# Altium PCB PCB1.PcbDoc (part 4 of 4)
Units mm, origin at the board's own origin, x right, y up, seen from the top; angles counter-clockwise.
Board outline 100 x 100 mm, 4 copper layers (Component Side 1, Ground Plane, Power Plane, Component Side 2), stack 0.844 mm thick; 174 components, 192 nets, 1098 pads, 545 vias.
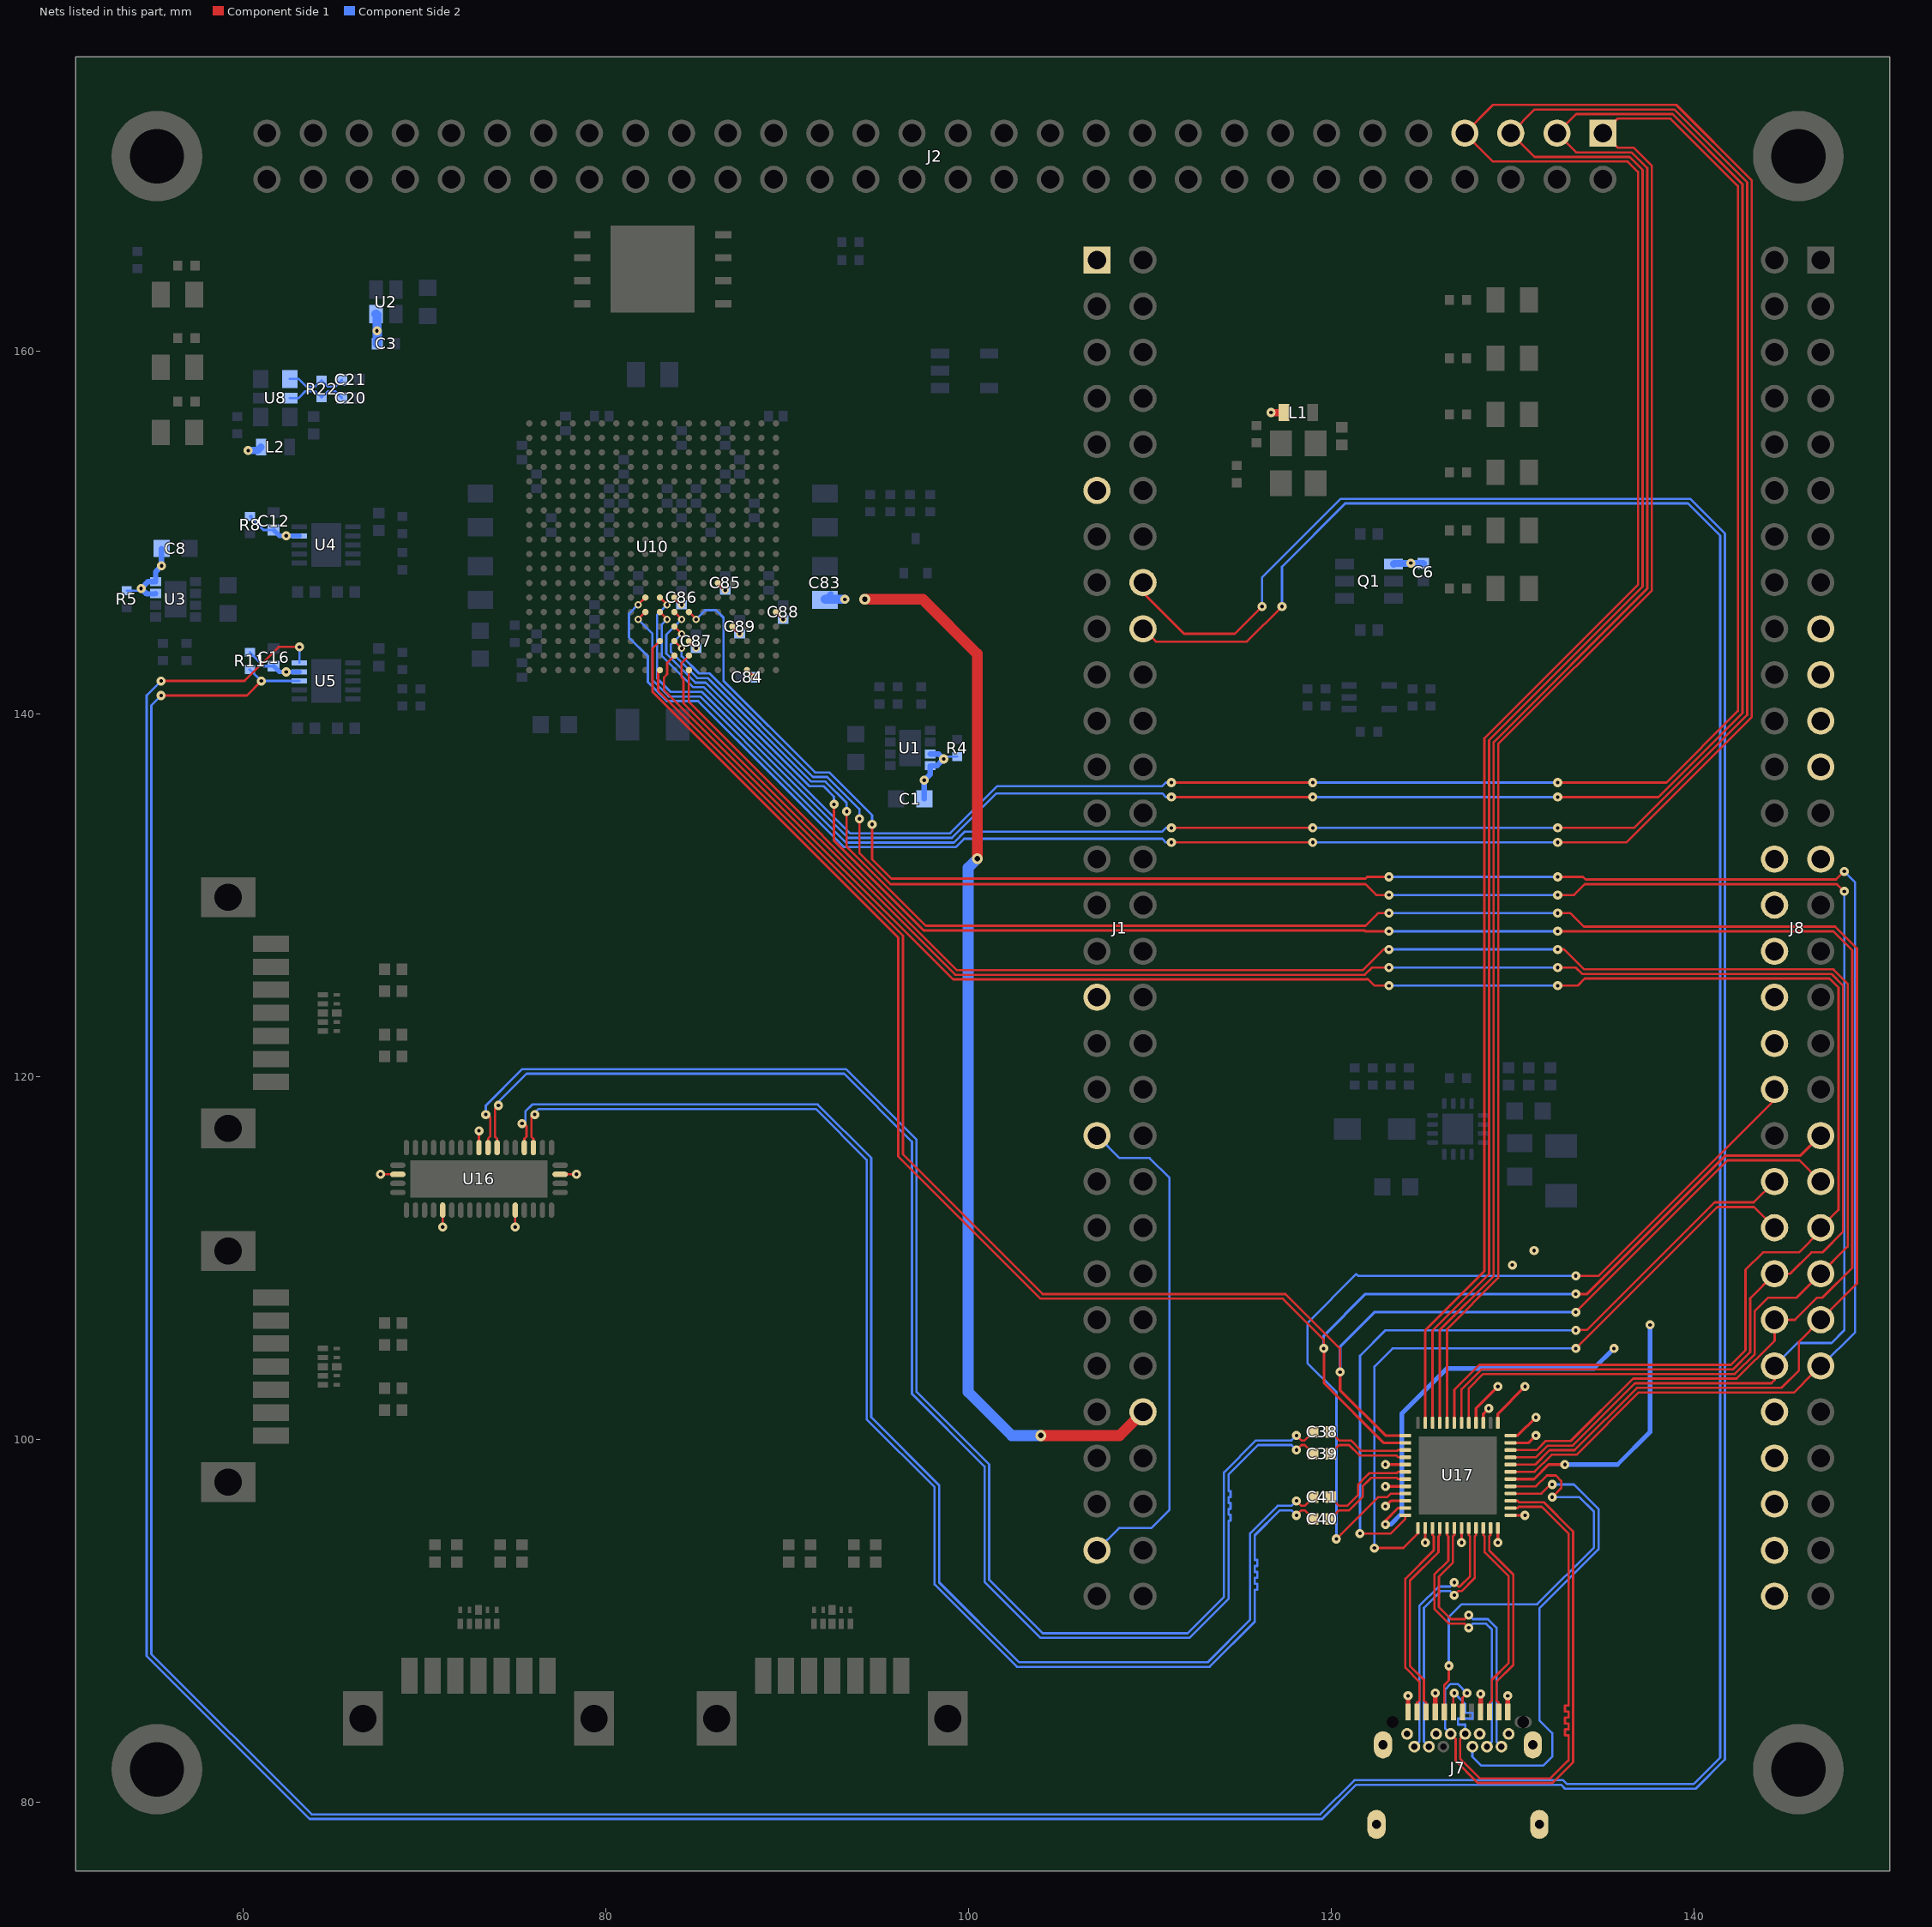
[diagram p5: the nets of this part, all layers, seen from the top]

## Via types
v1: diameter 0.5, hole 0.2, Component Side 1 to Component Side 2, 344 vias
v2: diameter 0.4, hole 0.2, Component Side 1 to Component Side 2, tented top, 149 vias
v3: diameter 0.6, hole 0.3, Component Side 1 to Component Side 2, 33 vias
v4: diameter 0.5, hole 0.2, Component Side 1 to Component Side 2, tented top, 14 vias
v5: diameter 0.5, hole 0.2, Component Side 1 to Component Side 2, tented bottom, 5 vias

## Nets (pads, with @x,y where several pads share a name; then routed paths per layer and width w, separated by ;. In a path a pad name is that pad's centre, name@x,y a point inside that pad or via, vN(x,y) a via of type N, cw(c..) or ccw(c..) an arc to the next point about the centre after c; other vN are vias at no path point) (continued)
U5_EN: J1.16 U5.5 | length 261.6
  Component Side 1 w0.127: v1(55.5,141.8) 60.1,141.8 61.975,143.675 v1(63.125,143.675) ; J1.16@109.64,147.22 109.64,146.66 111.9,144.4 114.7,144.4 v1(116.2,145.9)
  Component Side 2 w0.127: v1(55.5,141.8) 54.704,141.004 54.704,88.044 63.69,79.058 119.51,79.058 121.398,80.946 132.695,80.946 132.912,80.729 140.105,80.729 141.717,82.341 141.717,149.935 139.81,151.842 120.542,151.842 116.2,147.5 v1(116.2,145.9) ; U5.5@63.125,142.8 v1(63.125,143.675)
U5_PG: J1.18 R11.1 U5.3 | length 258.2
  Component Side 1 w0.127: v1(55.5,141) 60.225,141 v1(61.025,141.8) ; J1.18@109.64,144.68 110.349,143.971 115.371,143.971 v1(117.3,145.9)
  Component Side 2 w0.127: v1(55.5,141) 54.958,140.458 54.958,88.149 63.795,79.312 119.405,79.312 121.293,81.2 132.8,81.2 133.017,80.983 140,80.983 141.463,82.446 141.463,149.815 139.69,151.588 120.788,151.588 117.3,148.1 v1(117.3,145.9) ; R11.1@60.375,142.425 R11.1@60.4,142.425 v1(61.025,141.8) U5.3@63.125,141.8
U8_OUT_N: C20.2 R22.1 U8.5 | length 3.5
  Component Side 2 w0.127: U8.5@62.6,157.4 63.088,157.4 63.461,157.773 64.002,157.773 R22.1@64.35,157.425 64.698,157.773 65.097,157.773 C20.2@65.47,157.4
U8_OUT_P: C21.2 R22.2 U8.4 | length 3.5
  Component Side 2 w0.127: U8.4@62.6,158.45 63.088,158.45 63.511,158.027 64.002,158.027 R22.2@64.35,158.375 64.698,158.027 65.097,158.027 C21.2@65.47,158.4
U17A_RX_N: C39.1 U17.4 | length 4.6
  Component Side 1 w0.127: C39.1@119.98,99.2 120.453,99.673 121,99.673 121.573,99.1 123.611,99.1 123.712,99 U17.4@124.1,99
U17A_RX_P: C38.1 U17.3 | length 4.6
  Component Side 1 w0.127: C38.1@119.98,100.4 120.453,99.927 121.105,99.927 121.678,99.354 123.665,99.354 123.712,99.4 U17.3@124.1,99.4
U17A_TX_N: C41.1 U17.6 | length 5.4
  Component Side 1 w0.127: C41.1@119.98,96.8 120.453,96.327 120.9,96.327 121.5,96.927 121.5,97.505 121.897,97.903 122.122,98.127 123.639,98.127 123.712,98.2 U17.6@124.1,98.2
U17A_TX_P: C40.1 U17.7 | length 5.4
  Component Side 1 w0.127: C40.1@119.98,95.6 120.453,96.073 121.005,96.073 121.754,96.822 121.754,97.4 122.127,97.773 122.227,97.873 123.639,97.873 123.712,97.8 U17.7@124.1,97.8
UCONN0_CC1: J7.A5 U17.29 | length 23.9
  Component Side 1 w0.127: J7.A5@126.25,84.96 126.25,86.45 126.5,86.7 v1(126.5,87.5) ; U17.29@129.9,97.4 131.3,97.4 131.9,98 132.4,98 132.7,97.7 132.7,97.3 v1(132.2,96.8) ; v1@132.2,96.84 v1@132.2,96.9
  Component Side 2 w0.127: v1(126.5,87.5) 126.5,90.2 127.2,90.9 131.365,90.9 134.5,94.035 134.5,96 133.7,96.8 ; v1(132.2,96.8) 133.7,96.8
UCONN0_CC2: J7.B5 U17.28 | length 26.3
  Component Side 1 w0.127: U17.28@129.9,97 131.6,97 132.1,97.5 v1(132.2,97.5)
  Component Side 2 w0.127: J7.B5@127.8,83.05 127.8,82.5 128.3,82 131.7,82 132.2,82.5 132.2,83.8 131.495,84.505 131.495,90.671 134.754,93.93 134.754,96.146 133.4,97.5 v1(132.2,97.5)
UCONN0_D_N: J7.A7 J7.B7 U17.27 | length 31.2
  Component Side 1 w0.127: J7.B7@126.6,83.75 126.873,83.477 126.873,82.268 128.02,81.12 128.095,81.046 132.205,81.046 132.28,81.12 133.28,82.12 133.354,82.195 133.354,94.905 133.28,94.98 131.732,96.527 130.361,96.527 130.288,96.6 U17.27@129.9,96.6 ; J7.A7@127.25,84.96 127.25,85.75 v1(127.5,86)
  Component Side 2 w0.127: J7.B7@126.6,83.75 126.3,84.05 126.3,86.2 126.6,86.5 127,86.5 v1(127.5,86)
UCONN0_D_P: J7.A6 J7.B6 U17.26 | length 31.1
  Component Side 1 w0.127: J7.A6@126.75,84.96 126.75,86 v1@126.75,86.1 ; J7.B6@127.405,83.75 J7.B6@127.4,83.75 127.127,83.477 127.127,82.373 128.2,81.3 132.1,81.3 133.05,82.25 133.1,82.3 133.1,83.675 132.9,83.675 132.9,84.002 133.1,84.002 133.1,84.329 132.9,84.329 132.9,84.656 133.1,84.656 133.1,84.983 132.9,84.983 132.9,85.31 133.1,85.31 133.1,85.637 133.1,85.8 133.1,94.8 131.627,96.273 130.361,96.273 130.288,96.2 U17.26@129.9,96.2
  Component Side 2 w0.127: v1(126.8,86) 127.4,85.4 127.4,85.2 127.4,84.917 127.801,84.917 127.801,84.59 127.4,84.59 126.999,84.59 126.999,84.263 127.4,84.263 127.4,84.1 J7.B6@127.4,83.75
UCONN0_GND: J7.A1 J7.A12 J7.B1 J7.B12 J7.S1 J7.S2 J7.S3 J7.S4 J8.21 J8.23 | length 1.8
  Component Side 1 w0.254: J7.A1@124.25,84.96 v1(124.25,85.85) ; J7.A12@129.75,84.96 v1(129.75,85.85)
UCONN0_PWR: J7.A4 J7.A9 J7.B4 J7.B9 J8.17 J8.19 J8.27 | length 2
  Component Side 1 w0.254: J7.A4@125.75,84.96 v1(125.75,86) ; J7.A9@128.25,84.96 v1(128.25,85.95)
UCONN0_RX1_N: J7.B10 U17.21 | length 14.2
  Component Side 1 w0.127: v1(126.8,91.4) 127.023,91.623 127.205,91.623 127.927,92.345 127.927,94.639 128,94.712 U17.21@128,95.1
  Component Side 2 w0.127: J7.B10@125.4,83.05 125.127,83.323 125.127,90.7 126.05,91.623 126.577,91.623 v1(126.8,91.4)
UCONN0_RX1_P: J7.B11 U17.20 | length 14.2
  Component Side 1 w0.127: v1(126.8,92.1) 127.023,91.877 127.1,91.877 127.673,92.45 127.673,94.639 127.6,94.712 U17.20@127.6,95.1
  Component Side 2 w0.127: J7.B11@124.6,83.05 124.873,83.323 124.873,90.805 125.945,91.877 126.577,91.877 v1(126.8,92.1)
UCONN0_RX2_N: J7.A10 U17.22 | length 11.2
  Component Side 1 w0.127: U17.22@128.4,95.1 128.4,94.712 128.473,94.639 128.473,93.768 129.8,92.441 129.8,87.659 128.873,86.732 128.873,85.596 128.75,85.473 J7.A10@128.75,84.96
UCONN0_RX2_P: J7.A11 U17.23 | length 11.2
  Component Side 1 w0.127: U17.23@128.8,95.1 128.8,94.712 128.727,94.639 128.727,93.873 130.054,92.546 130.054,87.554 129.127,86.627 129.127,85.596 129.25,85.473 J7.A11@129.25,84.96
UCONN0_TX1_N: J7.A3 U17.16 | length 11.2
  Component Side 1 w0.127: J7.A3@125.25,84.96 125.25,85.473 125.127,85.596 125.127,86.732 124.354,87.505 124.354,92.195 125.927,93.768 125.927,94.639 126,94.712 U17.16@126,95.1
UCONN0_TX1_P: J7.A2 U17.15 | length 11.2
  Component Side 1 w0.127: J7.A2@124.75,84.96 124.75,85.473 124.873,85.596 124.873,86.627 124.1,87.4 124.1,92.3 125.673,93.873 125.673,94.639 125.6,94.712 U17.15@125.6,95.1
UCONN0_TX2_N: J7.B3 U17.17 | length 15.2
  Component Side 1 w0.127: U17.17@126.4,95.1 126.4,94.712 126.473,94.639 126.473,93.3 125.7,92.527 125.7,90.641 126.518,89.823 127.377,89.823 v1(127.6,89.6)
  Component Side 2 w0.127: v1(127.6,89.6) 127.823,89.823 128.55,89.823 128.873,89.5 128.873,83.323 J7.B3@128.6,83.05
UCONN0_TX2_P: J7.B2 U17.18 | length 15.2
  Component Side 1 w0.127: U17.18@126.8,95.1 126.8,94.712 126.727,94.639 126.727,93.195 125.954,92.422 125.954,90.746 126.623,90.077 127.377,90.077 v1(127.6,90.3)
  Component Side 2 w0.127: v1(127.6,90.3) 127.823,90.077 128.655,90.077 129.127,89.605 129.127,83.323 J7.B2@129.4,83.05
VCC_IN_3V3: C1.2 C3.2 C6.2 C8.2 C12.2 C16.2 J1.1 J1.11 J1.33 J1.39 J1.57 L1.2 L2.2 Q1.1 R4.2 R5.2 R8.2 R11.2 U1.3 U1.4 U2.1 U3.3 U3.4 U4.4 U5.4 U16.9 U16.19 U16.26 U16.34 U16.41 | length 53.6
  Component Side 1 w0.127: v1(67.6,114.6) U16.19@68.55,114.6 ; v1(71.025,111.7) U16.26@71.025,112.625 ; U16.9@73.025,116.075 v1(73.025,117) ; U16.34@75,112.6 U16.34@75.025,112.625 v1(75.025,111.7) ; U16.41@77.5,114.6 78.5,114.6 v1(78.4,114.6)
  Component Side 1 w0.4: v1(116.7,156.6) L1.2@117.41,156.6
  Component Side 2 w0.127: R5.2@53.6,146.775 54.275,146.775 v1(54.4,146.9) ; U1.3@97.9,137.775 U1.3@97.925,137.8 ; v1(98.65,137.5) 98.775,137.625 R4.2@99.4,137.625 ; J1.57@107.1,93.88 108.32,95.1 110.1,95.1 111.1,96.1 111.1,114.4 110,115.5 108.34,115.5 J1.39@107.1,116.74
  Component Side 2 w0.153: R11.2@60.4,143.375 61.155,142.62 C16.2@61.7,142.62 ; R8.2@60.5,150.875 R8.2@60.4,150.875 61.155,150.12 C12.2@61.7,150.12
  Component Side 2 w0.254: C16.2@61.7,142.62 62.02,142.3 U5.4@63.125,142.3 ; C12.2@61.7,150.12 62.02,149.8 U4.4@63.125,149.8
  Component Side 2 w0.3: U3.3@55.2,146.625 55.175,146.6 54.7,146.6 v1(54.4,146.9) 54.775,147.275 U3.4@55.2,147.275 55.2,147.825 v1(55.525,148.15) C8.2@55.525,149.1 ; C1.2@97.575,135.3 v1(97.575,136.325) 97.9,136.65 U1.4@97.9,137.125 98.275,137.125 v1(98.65,137.5) 98.375,137.775 U1.3@97.9,137.775
  Component Side 2 w0.4: v1(60.3,154.5) 60.81,154.5 L2.2@61.01,154.7 ; Q1.1@123.45,148.25 123.48,148.28 C6.2@125.1,148.28
  Component Side 2 w0.5: U2.1@67.35,162.025 67.4,161.975 v1(67.4,161.1) 67.42,161.08 C3.2@67.42,160.4
  other v1: 62.4,142.3 124.4,148.3 62.4,149.8
VCCIO_34: C83.2 C84.2 C85.2 C86.2 C87.2 C88.2 C89.2 J1.52 U10.L6 U10.M3 U10.P7 U10.R4 U10.T1 U10.V5 | length 64.5
  Component Side 1 w0.2: U10.L6@83.8,146.4 v2(84.2,146) ; U10.M3@84.6,144 v2(85,143.6) ; U10.P7@86.2,147.2 v2(86.6,146.8) ; U10.R4@87,144.8 v2(87.4,144.4) ; U10.T1@87.8,142.4 v2(88.2,142) ; U10.V5@89.4,145.6 v2(89.8,145.2)
  Component Side 1 w0.6: v3(94.3,146.3) 97.5,146.3 100.5,143.3 v3(100.5,132) ; v3(104,100.2) 108.34,100.2 J1.52@109.64,101.5
  Component Side 2 w0.3: C83.2@92.1,146.275 C83.2@92.125,146.3 ; C83.2@92.1,146.3 C83.2@92.125,146.3 ; C83.2@92.425,146.6 C83.2@92.125,146.3
  Component Side 2 w0.5: C83.2@92.125,146.3 v1(93.2,146.3)
  Component Side 2 w0.6: v3(100.5,132) 100,131.5 100,102.6 102.4,100.2 v3(104,100.2)
VL716_BUSYIND: J8.46 U10.M2 U17.42 | length 115.3
  Component Side 1 w0.127: U10.M2@84.6,143.2 84.2,142.8 84.2,142 84.3,141.9 84.3,140.578 99.278,125.6 121.859,125.6 122.259,126 v1(123.2,126) ; U17.42@127.2,100.9 127.2,102.759 128.287,103.846 142.158,103.846 143.112,104.799 143.112,107.772 J8.46@144.46,109.12 145.32,109.12 146.5,110.3 147.1,110.3 148.238,111.438 148.238,125.003 147.595,125.646 133.854,125.646 133.5,126 v1(132.5,126)
  Component Side 2 w0.127: v1(123.2,126) v1(132.5,126)
VL716_DCVCC12: J8.52 U17.39 | length 0.9
  Component Side 1 w0.153: U17.39@128.4,100.9 128.4,101.4 v1(128.7,101.7)
VL716_GPIO1: J8.39 U10.K3 U17.2 | length 102.8
  Component Side 1 w0.127: U10.K3@83,144 82.6,143.6 82.6,141.2 96.146,127.654 96.146,115.595 103.995,107.746 117.354,107.746 119.6,105.5 v1(119.6,105)
  Component Side 1 w0.153: v1(119.6,105) 119.62,104.98 119.62,103.08 122.9,99.8 U17.2@124.1,99.8 ; v1(133.5,108) 134.122,108 141.76,115.638 145.898,115.638 J8.39@147,116.74
  Component Side 2 w0.153: v1(119.6,105) 119.6,105.7 121.9,108 v1(133.5,108)
VL716_GPIO2: J8.41 U10.K1 U17.1 | length 100.4
  Component Side 1 w0.127: U10.K1@83,142.4 83,142.376 82.903,142.279 82.903,141.257 96.4,127.759 96.4,115.7 104.1,108 117.5,108 120.5,105 v1(120.5,103.7) ; v1(133.5,107) 141.871,115.371 145.829,115.371 J8.41@147,114.2
  Component Side 1 w0.153: v1(120.5,103.7) 120.5,102.7 123,100.2 U17.1@124.1,100.2
  Component Side 2 w0.153: v1(120.5,103.7) 120.5,105.1 122.4,107 v1(133.5,107)
VL716_GPIO5: J8.47 U10.L4 U17.32 | length 118.6
  Component Side 1 w0.127: U10.L4@83.8,144.8 v2(84.2,144.4) ; v1(93.3,134.6) 93.3,132.655 97.655,128.3 121.9,128.3 122.6,129 v1(123.2,129) ; U17.32@129.9,98.6 131.263,98.6 132.055,99.392 133.433,99.392 136.871,102.83 144.83,102.83 145.8,103.8 145.8,105.38 J8.47@147,106.58 149,108.58 149,127.059 147.805,128.254 133.946,128.254 133.2,129 v1(132.5,129)
  Component Side 2 w0.127: v2(84.2,144.4) 83.608,143.808 83.608,143.41 85.056,141.962 85.634,141.962 91.342,136.254 92.124,136.254 93.3,135.078 v1(93.3,134.6) ; v1(123.2,129) v1(132.5,129)
VL716_GPIO6: J8.48 U10.L5 U17.34 | length 117.6
  Component Side 1 w0.127: U10.L5@83.8,145.6 v2(84.2,145.2) ; v1(92.6,135) 92.6,132.996 97.55,128.046 121.854,128.046 121.9,128 v1(123.2,128) ; U17.34@129.916,99.385 U17.34@129.9,99.4 131.345,99.4 131.845,99.9 133.222,99.9 136.66,103.338 142.368,103.338 144.46,105.43 J8.48@144.46,106.58 145.58,106.58 146.8,107.8 147.1,107.8 148.746,109.446 148.746,126.954 147.7,128 v1(132.5,128)
  Component Side 2 w0.127: v2(84.2,145.2) 83.354,144.354 83.354,143.305 84.951,141.708 85.529,141.708 91.237,136 92.018,136 92.6,135.418 v1(92.6,135) ; v1(123.2,128) v1(132.5,128)
VL716_GPIO7: J8.50 U10.L3 U17.33 | length 118.3
  Component Side 1 w0.127: U10.L3@83.8,144 v2(84.2,143.6) ; v1(94,134.2) 94,132.314 95.714,130.6 121.9,130.6 122.5,130 v1(123.2,130) ; U17.33@129.9,99 131.304,99 131.95,99.646 133.328,99.646 136.766,103.084 144.284,103.084 144.46,103.26 J8.50@144.46,104.04 ; v1(132.5,130) 133.4,130 134,130.6 147.9,130.6 v1(148.3,130.2)
  Component Side 2 w0.127: v2(84.2,143.6) 84.2,143.178 85.162,142.216 85.739,142.216 91.447,136.508 92.229,136.508 94,134.737 v1(94,134.2) ; v1(123.2,130) v1(132.5,130) ; J8.50@144.46,104.04 145.72,105.3 147.6,105.3 148.3,106 v1(148.3,130.2)
VL716_GPIO8: J8.49 U10.M5 U17.31 | length 121.8
  Component Side 1 w0.127: U10.M5@84.6,145.6 v2(85,145.2) ; v1(94.7,133.9) 94.7,131.974 95.774,130.9 121.9,130.9 122,131 v1(123.2,131) ; U17.31@129.9,98.2 131.222,98.2 132.16,99.138 133.538,99.138 136.976,102.576 145.541,102.576 146.054,103.089 146.054,103.094 J8.49@147,104.04 ; v1(132.5,131) 133.9,131 134.046,130.854 147.854,130.854 v1(148.3,131.3)
  Component Side 2 w0.127: v2@85,145.184 v2(85,145.2) 85.5,145.7 86.1,145.7 86.51,145.29 86.51,141.805 91.552,136.762 92.334,136.762 94.7,134.396 v1(94.7,133.9) ; v1(123.2,131) v1(132.5,131) ; J8.49@147,104.04 147.04,104.04 148.9,105.9 148.9,130.7 v1(148.3,131.3)
VL716_LDOVDD33O: J8.36 U17.11 | length 21.4
  Component Side 1 w0.153: v1(123,95.3) 123,95.5 123.7,96.2 U17.11@124.1,96.2
  Component Side 2 w0.254: v1(123,95.3) 123.3,95.3 123.906,95.906 123.906,101.406 126.4,103.9 134.5,103.9 v1(135.6,105)
VL716_LX: J8.32 U17.37 | length 2.6
  Component Side 1 w0.153: U17.37@129.2,100.9 129.2,101.4 v1(130.7,102.9)
VL716_OSCVCC12: J8.60 U17.14 | length 0.8
  Component Side 1 w0.153: v1(125.2,94.3) U17.14@125.2,95.1
VL716_OSCXI: J8.42 U17.12 | length 39.7
  Component Side 1 w0.127: v1(121.6,94.8) 123.3,94.8 124.1,95.6 U17.12@124.1,95.8 ; v1(133.5,106) 133.525,106.025 134.125,106.025 141.154,113.054 143.314,113.054 J8.42@144.46,114.2
  Component Side 2 w0.127: v1(121.6,94.8) 121.6,104.6 123,106 v1(133.5,106)
VL716_OSCXO: J8.44 U17.13 | length 39.2
  Component Side 1 w0.127: v1(122.4,94) 124,94 124.8,94.8 U17.13@124.8,95.1 ; v1(133.5,105) 141.3,112.8 143.32,112.8 J8.44@144.46,111.66
  Component Side 2 w0.127: v1(122.4,94) 122.4,104 123.4,105 v1(133.5,105)
VL716_PWRIND: J8.43 U10.L2 U17.43 | length 116.1
  Component Side 1 w0.127: U10.L2@83.8,143.2 83.4,142.8 83.4,142.171 83.229,142 83.229,141.289 99.172,125.346 121.964,125.346 122.009,125.391 122.4,125 v1(123.2,125) ; U17.43@126.8,100.9 126.8,102.718 128.182,104.1 142.053,104.1 142.858,104.905 142.858,109.342 143.815,110.3 145.8,110.3 147,111.5 J8.43@147,111.66 147.984,112.644 147.984,124.898 147.49,125.392 133.992,125.392 133.6,125 v1(132.5,125)
  Component Side 2 w0.127: v1(123.2,125) v1(132.5,125)
VL716_RESET: J8.45 U10.M1 U17.41 | length 114.9
  Component Side 1 w0.127: U10.M1@84.6,142.4 84.6,140.637 99.383,125.854 121.754,125.854 122.9,127 v1(123.2,127) ; U17.41@127.6,100.9 127.6,102.8 128.392,103.592 142.263,103.592 143.366,104.694 143.366,107.066 144.1,107.8 145.68,107.8 J8.45@147,109.12 148.492,110.612 148.492,125.108 147.7,125.9 133.959,125.9 132.859,127 v1(132.5,127)
  Component Side 2 w0.127: v1(123.2,127) v1(132.5,127)
VL716_REXT: J8.38 U17.9 | length 48.9
  Component Side 1 w0.127: v1(120.3,94.5) 122.6,96.8 123.1,96.8 123.3,97 U17.9@124.1,97 ; v1(133.5,109) 134.745,109 144.46,118.715 J8.38@144.46,119.28
  Component Side 2 w0.127: v1(120.3,94.5) 120.3,102.6 118.7,104.2 118.7,106.4 121.4,109.1 121.5,109 v1(133.5,109)
VL716_RX_N: C39.2 U16.7 | length 82.5
  Component Side 1 w0.127: U16.7@74.025,116.075 74.025,116.564 73.915,116.673 73.915,118.215 v1(74.1,118.4) ; v1(118.1,99.4) 118.373,99.673 118.547,99.673 C39.2@119.02,99.2
  Component Side 2 w0.127: v1(74.1,118.4) 74,118.5 75.646,120.146 93.154,120.146 96.9,116.4 96.9,102.5 100.9,98.5 100.9,92.141 103.995,89.046 112.205,89.046 114.354,91.195 114.354,92.2 114.354,95.502 114.465,95.502 114.465,95.829 114.354,95.829 114.354,96.156 114.465,96.156 114.465,96.483 114.354,96.483 114.354,96.81 114.465,96.81 114.465,97.137 114.354,97.137 114.354,97.3 114.354,98.054 115.973,99.673 117.827,99.673 v1(118.1,99.4)
VL716_RX_P: C38.2 U16.8 | length 82.6
  Component Side 1 w0.127: v1(73.4,117.9) 73.5,117.9 73.648,117.752 73.648,116.687 73.525,116.564 U16.8@73.525,116.075 ; v1(118.1,100.2) 118.373,99.927 118.547,99.927 C38.2@119.02,100.4
  Component Side 2 w0.127: v1(73.4,117.9) 73.4,118.388 75.412,120.4 93.259,120.4 97.154,116.505 97.154,102.605 101.154,98.605 101.154,92.246 104.1,89.3 112.1,89.3 114.1,91.3 114.1,98.159 115.868,99.927 117.827,99.927 v1(118.1,100.2)
VL716_SPI_CLK: J2.5 U10.J5 U17.46 | length 197.9
  Component Side 1 w0.127: v2(81.8,145.2) U10.J5@82.2,145.6 ; v1(111.2,133.7) v1(119,133.7) ; U17.46@125.6,100.9 125.6,102.2 125.6,105.983 128.717,109.1 128.717,138.535 137.184,147.002 137.184,169.975 136.467,170.692 131.228,170.692 J2.5@129.92,172 131.228,173.308 138.933,173.308 142.946,169.295 142.946,139.928 136.718,133.7 v1(132.5,133.7)
  Component Side 2 w0.127: v2@81.9,145.2 v2(81.8,145.2) 82.592,144.408 82.592,141.849 83.495,140.946 85.213,140.946 90.118,136.041 93.267,132.892 99.21,132.892 99.818,133.5 110.7,133.5 110.9,133.7 v1(111.2,133.7) ; v1(119,133.7) v1(132.5,133.7)
VL716_SPI_CS: J2.1 U10.K5 U17.44 | length 184.5
  Component Side 1 w0.127: U10.K5@83,145.6 v2(83.4,145.2) ; v1(111.2,136.2) v1(119,136.2) ; U17.44@126.4,100.9 126.4,106.065 129.225,108.89 129.225,138.325 137.692,146.792 137.692,170.186 136.678,171.2 135.8,171.2 J2.1@135,172 135.8,172.8 138.722,172.8 142.438,169.084 142.438,140.138 138.5,136.2 v1(132.5,136.2)
  Component Side 2 w0.127: v2(83.4,145.2) 83.1,144.9 83.1,143.2 84.846,141.454 85.424,141.454 89.429,137.448 91.509,135.368 93.477,133.4 99,133.4 101.6,136 110.7,136 110.9,136.2 v1(111.2,136.2) ; v1(119,136.2) v1(132.5,136.2)
VL716_SPI_D: J2.7 U10.J6 U17.47 | length 205.3
  Component Side 1 w0.127: v2(81.8,146) U10.J6@82.2,146.4 ; v1(111.2,132.9) v1(119,132.9) ; U17.47@125.2,100.9 125.2,102.1 125.2,106 128.463,109.263 128.463,138.641 136.93,147.108 136.93,169.87 136.362,170.438 128.942,170.438 J2.7@127.38,172 128.942,173.562 139.038,173.562 143.2,169.4 143.2,139.822 136.278,132.9 v1(132.5,132.9)
  Component Side 2 w0.127: v2(81.8,146) 81.3,145.5 81.3,144.2 82.338,143.162 82.338,141.744 83.39,140.692 85.108,140.692 89.3,136.5 93.161,132.638 99.316,132.638 99.778,133.1 110.7,133.1 110.9,132.9 v1(111.2,132.9) ; v1(119,132.9) v1(132.5,132.9)
VL716_SPI_Q: J2.3 U10.K6 U17.45 | length 192.5
  Component Side 1 w0.127: U10.K6@83,146.4 v2(83.4,146) ; v1(111.2,135.4) v1(119,135.4) ; U17.45@126,100.9 126,106.024 128.971,108.995 128.971,138.43 137.438,146.897 137.438,170.08 136.572,170.946 133.514,170.946 J2.3@132.46,172 133.514,173.054 138.828,173.054 142.692,169.19 142.692,140.033 138.059,135.4 v1(132.5,135.4)
  Component Side 2 w0.127: v2(83.4,146) 82.846,145.446 82.846,141.954 83.6,141.2 85.318,141.2 90.818,135.7 ; 90.818,135.7 93.372,133.146 99.105,133.146 101.559,135.6 110.7,135.6 110.9,135.4 v1(111.2,135.4) ; v1(119,135.4) v1(132.5,135.4)
VL716_SVDD12: J8.54 U17.5 U17.8 | length 1.9
  Component Side 1 w0.153: v1(123,97.4) U17.8@124.1,97.4 ; 123.3,98.6 U17.5@124.1,98.6
  other v1: 123,98.6
VL716_TX_N: C41.2 U16.4 | length 77
  Component Side 1 w0.127: v1(75.4,117.4) 75.5,117.4 75.646,117.254 75.646,116.685 75.525,116.564 U16.4@75.525,116.075 ; v1(118.1,96.6) 118.373,96.327 118.547,96.327 C41.2@119.02,96.8
  Component Side 2 w0.127: v1(75.4,117.4) 75.515,117.4 75.585,117.469 75.585,118.072 75.966,118.454 91.705,118.454 94.654,115.505 94.654,101.205 98.4,97.459 98.4,92.1 102.8,87.7 113.2,87.7 115.546,90.046 115.546,94.805 117.068,96.327 117.827,96.327 v1(118.1,96.6)
VL716_TX_P: C40.2 U16.3 | length 77
  Component Side 1 w0.127: U16.3@76.025,116.075 76.025,116.564 75.915,116.673 75.915,117.815 76,117.9 v1(76.1,117.9) ; v1(118.1,95.8) 118.373,96.073 118.547,96.073 C40.2@119.02,95.6
  Component Side 2 w0.127: v1(76.1,117.9) 76.1,118 76.3,118.2 91.6,118.2 94.4,115.4 94.4,101.1 98.146,97.354 98.146,91.995 102.695,87.446 113.305,87.446 115.8,89.941 115.8,91.702 115.936,91.702 115.936,92.029 115.8,92.029 115.8,92.356 115.936,92.356 115.936,92.683 115.8,92.683 115.8,93.01 115.936,93.01 115.936,93.337 115.8,93.337 115.8,93.5 115.8,94.7 117.173,96.073 117.827,96.073 v1(118.1,95.8)
VL716_UVDD12: J8.58 U17.19 U17.24 | length 1.6
  Component Side 1 w0.153: v1(127.2,94.3) U17.19@127.2,95.1 ; v1(129.2,94.3) U17.24@129.2,95.1
VL716_VCC3: J8.30 U17.35 U17.40 | length 4.1
  Component Side 1 w0.153: U17.40@128,100.9 128,101.7 v1(129.2,102.9) ; U17.35@129.9,99.8 130.9,99.8 v1(131.3,100.2)
  other v1: 130,109.6 131.2,110.4
VL716_VCCU: J8.56 U17.25 | length 0.8
  Component Side 1 w0.153: U17.25@129.9,95.8 v1(130.7,95.8)
VL716_VDD5: J8.28 U17.10 U17.36 | length 3
  Component Side 1 w0.153: v1(123,96.3) 123.3,96.6 U17.10@124.1,96.6 ; U17.36@129.9,100.2 130.3,100.2 v1(131.3,101.2)
VL716_VDD12I: J8.34 U17.30 | length 14.7
  Component Side 1 w0.153: U17.30@129.9,97.8 131.2,97.8 132,98.6 v1(132.9,98.6)
  Component Side 2 w0.254: v1(132.9,98.6) 135.8,98.6 137.6,100.4 v1(137.6,106.3)
pads on no net: J1.26 J1.35 J1.36 J1.37 J1.41 J1.42 J1.43 J1.44 J1.45 J1.46 J1.47 J1.48 J1.49 J1.50 J2.9 J2.11 J2.13 J2.14 J2.15 J2.16 J2.17 J2.18 J2.19 J2.20 J2.21 J2.22 J2.23 J2.24 J2.25 J2.26 J2.27 J2.28 J2.29 J2.30 J2.31 J2.32 J2.33 J2.34 J2.47 J2.48 J3. J4. J5. J6. J7. J7.A8 J7.B8 J8.1 J8.2 J8.15 J8.16 J8.25 J8.26 J8.29 J8.31 J8.33 J8.35 J8.37 J8.51 J8.53 J8.55 J8.57 J8.59 U6.1 U8.2 U9.9 U10.A9 U10.A10 U10.A12 U10.A13 U10.A14 U10.A15 U10.B9 U10.B10 U10.B11 U10.B12 U10.B14 U10.B15 U10.C8 U10.C9 U10.C11 U10.C14 U10.C17 U10.C18 U10.D8 U10.D9 U10.D18 U10.E17 U10.E18 U10.F14 U10.F15 U10.F17 U10.F18 U10.G14 U10.G15 U10.G16 U10.G17 U10.H14 U10.H16 U10.H17 U10.H18 U10.J4 U10.J14 U10.K2 U10.K15 U10.K17 U10.K18 U10.L18 U10.M4 U10.M6 U10.M14 U10.M16 U10.M17 U10.N1 U10.N2 U10.N3 U10.N4 U10.N6 U10.N14 U10.N16 U10.N17 U10.N18 U10.P1 U10.P3 U10.P4 U10.P5 U10.P6 U10.P14 U10.P15 U10.P16 U10.P18 U10.R1 U10.R2 U10.R3 U10.R5 U10.R6 U10.R7 U10.R15 U10.R16 U10.R17 U10.R18 U10.T2 U10.T3 U10.T4 U10.T5 U10.T7 U10.T12 U10.T13 U10.T15 U10.T17 U10.T18 U10.U1 U10.U2 U10.U4 U10.U5 U10.U6 U10.U7 U10.U9 U10.U11 U10.U12 U10.U14 U10.V2 U10.V3 U10.V4 U10.V6 U10.V7 U10.V8 U10.V9 U10.V11 U10.V12 U10.V13 U10.V14 U11.1 U16.10 U16.11 U16.12 U16.13 U16.14 U16.15 U16.16 U16.17 U16.21 U16.23 U16.24 U16.25 U16.27 U16.28 U16.31 U16.35 U16.39 U17.48

## Polygon pours and split planes (outlines as drawn)
1.35V on Component Side 2 "POLY_1.35V" (solid, pour order 6): 63.3,149 63.3,146.2 62.7,145.6 61.1,145.6 60,144.5 58.9,144.5 58.6,144.2 58.6,142.4 61.4,139.6 62.1,139.6 62.2,139.7 62.2,141.2 62.5,141.5 63.3,141.5 63.3,138.7 63,138.4 61.2,138.4 57.7,141.9 57.7,143.3 57.3,143.7 56.7,143.7 56.7,144.4 57.8,145.5 58.1,145.5 58.3,145.7 59.8,145.7 60.6,146.5 61.9,146.5 62.2,146.8 62.2,148.7 62.5,149
GND on Component Side 2 "Component Side 1-No Net" (solid, pour order 11): 124.873,90.854 124.873,86.4 129.127,86.4 129.127,90.573 128.846,90.854
GND on Component Side 2 "Component Side 1-No Net" (solid, pour order 15): 72.2,94.2 94.9,94.2 95.5,94.8 95.5,98.1 94.9,98.7 72.2,98.7 71.5,98 71.5,94.9
GND on Component Side 2 "Component Side 1-No Net" (solid, pour order 19): 69.7,135.1 75.7,135.1 75.7,136.359 75.1,136.959 75.1,139.9 76.4,141.2 76.4,141.3 80.6,141.3 79.9,140.6 79.9,133.959 79.595,133.654 72,133.654 72,127.8 73.6,127.8 79.426,121.974 74.057,121.974 74.057,117.1 72.4,117.1 68.7,120.8 68.7,134.1
GND on Component Side 2 "Component Side 1-No Net" (solid, pour order 21): 68.012,138.412 68.988,138.412 69.7,137.7 69.7,135.9 69.427,135.627 68.168,135.627 67.373,134.832 67.373,125.627 65.327,127.673 65.327,135.504
GND on Component Side 2 "Component Side 1-No Net" (solid, pour order 23): 73.891,122.1 97.154,122.1 97.154,102.4 101,98.5 101,92.3 104.05,89.25 112.1,89.25 114.125,91.275 114.125,98.1 115.91,99.885 118.115,99.885 119,99 119,97.2 118.127,96.327 117.068,96.327 115.546,94.805 115.546,90.046 113.2,87.7 102.8,87.7 98.4,92.1 98.4,97.459 94.654,101.205 94.654,115.505 91.8,118.359 76.061,118.359 75.966,118.454 75.6,118.088 75.6,117.1 73.891,117.1
GND on Component Side 2 "Component Side 1-No Net" (solid, pour order 25): 67.4,159.2 70.7,159.2 71.7,158.2 71.7,156 74.2,153.5 74.2,151.5 71.7,151.5 71.7,147.5 70.2,147.5 69.4,148.3 69.4,153.9 66.9,156.4 66.9,158.7
GND on Component Side 1 "Component Side 1-No Net" (solid, pour order 8): 63.7,129 63.7,128 65,126.7 69.2,126.7 69.2,119.254 70.554,117.9 77.8,117.9 79.2,116.5 79.2,112.244 77.783,110.827 74.3,110.827 74.3,107.252 72.756,105.8 69.2,105.8 69.2,98.074 71.247,96.027 71.247,94.6 94.3,94.6 94.3,97.1 85.644,97.1 85.644,109 85.644,122.171 82.5,125.314 82.5,138.8 81.3,140 81.3,141.3 74.75,141.3 74.75,145.125 74.427,145.448 71.457,145.448 69.4,143.391 69.407,138.407 68.6,137.6 68.6,132.047 66.853,130.3 65,130.3
GND on Component Side 1 "Component Side 1-No Net" (solid, pour order 9): 125.927,94.3 125.927,93.568 124.2,91.841 124.2,87.659 125.359,86.5 128.641,86.5 129.8,87.659 129.8,92.441 128.473,93.768 128.473,94.3
12V_GND on Ground Plane (split plane): 150.29,148.651 145.851,148.651 145.851,153.629 145.846,153.669 145.831,153.705 145.807,153.736 145.776,153.761 145.739,153.776 145.7,153.781 143.151,153.781 143.151,155.849 150.29,155.849
VL716_VCC3 on Ground Plane (split plane): 131.832,99.252 130.102,99.252 130.102,102 130.094,102.065 130.068,102.126 130.028,102.178 129.976,102.218 129.915,102.244 129.85,102.252 128.752,102.252 128.752,104 128.744,104.065 128.741,104.072 128.749,104.133 128.749,110.732 131.832,110.732
GND on Ground Plane (split plane): 150.29,156.151 143,156.151 142.961,156.146 142.924,156.131 142.893,156.107 142.869,156.076 142.854,156.039 142.849,156 142.849,153.659 142.854,153.62 142.869,153.583 142.893,153.552 142.91,153.539 142.923,153.523 142.954,153.498 142.99,153.483 143.029,153.478 145.549,153.478 145.549,148.6 145.554,148.561 145.558,148.55 145.554,148.539 145.549,148.5 145.554,148.461 145.569,148.424 145.593,148.393 145.624,148.369 145.661,148.354 145.7,148.349 150.29,148.349 150.29,146.151 145.8,146.151 145.761,146.146 145.724,146.131 145.693,146.107 145.669,146.076 145.654,146.039 145.649,146 145.649,84.9 145.654,84.861 145.663,84.839 145.669,84.824 145.693,84.793 147.549,82.937 147.549,80.863 145.937,79.251 134.556,79.251 134.556,87.5 134.547,87.566 134.522,87.628 134.481,87.681 134.428,87.722 134.366,87.747 134.3,87.756 119.7,87.756 119.634,87.747 119.572,87.722 119.519,87.681 119.478,87.628 119.453,87.566 119.444,87.5 119.444,76.71 51.31,76.71 51.31,175.69 150.29,175.69
UCONN0_GND on Ground Plane (split plane): 150.29,76.71 119.956,76.71 119.956,87.244 134.044,87.244 134.044,79.1 134.053,79.034 134.078,78.972 134.119,78.919 134.172,78.878 134.234,78.853 134.3,78.844 134.366,78.853 134.428,78.878 134.481,78.919 134.504,78.949 146,78.949 146.039,78.954 146.076,78.969 146.107,78.993 147.807,80.693 147.831,80.724 147.846,80.761 147.851,80.8 147.851,83 147.846,83.039 147.837,83.061 147.831,83.076 147.807,83.107 145.951,84.963 145.951,145.849 150.29,145.849
12V_PWR on Power Plane (split plane): 150.29,156.151 143.151,156.151 143.151,158.549 145.7,158.549 145.739,158.554 145.776,158.569 145.807,158.593 145.831,158.624 145.846,158.661 145.851,158.7 145.851,163.649 150.29,163.649
MAIN_PWR on Power Plane (split plane): 145.549,158.851 143,158.851 142.961,158.846 142.924,158.831 142.893,158.807 142.869,158.776 142.854,158.739 142.849,158.7 142.849,156 142.854,155.961 142.869,155.924 142.893,155.893 142.924,155.869 142.961,155.854 143,155.849 150.29,155.849 150.29,146.151 145.8,146.151 145.761,146.146 145.724,146.131 145.693,146.107 145.669,146.076 145.654,146.039 145.649,146 145.649,133.429 136,133.429 135.95,133.42 135.908,133.392 135.88,133.35 135.87,133.3 135.87,114.63 132.629,114.63 132.629,146 132.629,163.671 145.549,163.671
VL716_VDD12I on Power Plane (split plane): 145.649,123.234 141.8,123.234 141.761,123.227 141.728,123.204 141.706,123.171 141.698,123.132 141.698,105.602 131.702,105.602 131.702,107.398 140.5,107.398 140.539,107.406 140.572,107.428 140.594,107.461 140.602,107.5 140.602,125.498 145.649,125.498
VL716_VCC3 on Power Plane (split plane): 145.649,128.302 139.3,128.302 139.261,128.294 139.228,128.272 139.206,128.239 139.198,128.2 139.198,109.302 127.602,109.302 127.602,110.898 138.1,110.898 138.139,110.906 138.172,110.928 138.194,110.961 138.202,111 138.202,130.598 145.649,130.598
VL716_LDOVDD33O on Power Plane (split plane): 145.649,102.902 131.702,102.902 131.702,105.398 141.8,105.398 141.839,105.406 141.872,105.428 141.894,105.461 141.902,105.5 141.902,123.03 145.649,123.03
VL716_LX on Power Plane (split plane): 145.649,125.702 140.5,125.702 140.461,125.694 140.428,125.672 140.406,125.639 140.398,125.6 140.398,107.602 131.6,107.602 131.561,107.594 131.528,107.572 131.506,107.539 131.498,107.5 131.498,102.842 131.158,102.502 127.602,102.502 127.602,109.098 139.3,109.098 139.339,109.106 139.372,109.128 139.394,109.161 139.402,109.2 139.402,128.098 145.649,128.098
VL716_DCVCC12 on Power Plane (split plane): 145.649,100.302 137.702,100.302 137.702,100.8 137.702,101.2 137.694,101.239 137.672,101.272 137.639,101.294 137.6,101.302 132.242,101.302 131.872,101.672 131.839,101.694 131.8,101.702 130.775,101.702 130.736,101.694 130.703,101.672 130.333,101.302 127.602,101.302 127.602,102.298 131.2,102.298 131.239,102.306 131.272,102.328 131.642,102.698 145.649,102.698
VL716_UVDD12 on Power Plane (split plane): 145.649,92.702 126.302,92.702 126.302,95.098 145.649,95.098
UCONN0_PWR on Power Plane (split plane): 150.29,76.71 120.656,76.71 120.656,86.544 133.344,86.544 133.344,79.1 133.353,79.034 133.378,78.972 133.419,78.919 133.472,78.878 133.534,78.853 133.6,78.844 133.666,78.853 133.728,78.878 133.781,78.919 133.804,78.949 145.8,78.949 145.839,78.954 145.876,78.969 145.907,78.993 145.931,79.024 145.946,79.061 145.951,79.1 145.951,89.9 145.951,92.6 145.951,95.2 145.951,97.7 145.951,100.2 145.947,100.232 145.951,100.265 145.951,145.849 150.29,145.849
VCC_IN_3V3 on Power Plane (split plane): 145.649,79.251 133.856,79.251 133.856,86.8 133.847,86.866 133.822,86.928 133.781,86.981 133.728,87.022 133.666,87.047 133.6,87.056 120.652,87.056 120.652,89.798 145.649,89.798
VL716_SVDD12 on Power Plane (split plane): 145.649,97.802 129.8,97.802 129.761,97.794 129.728,97.772 129.706,97.739 129.698,97.7 129.698,97.002 122.567,97.002 122.567,98.998 137.6,98.998 137.639,99.006 137.672,99.028 137.694,99.061 137.702,99.1 137.702,100.098 145.649,100.098
VL716_VDD5 on Power Plane (split plane): 145.649,130.802 138.1,130.802 138.061,130.794 138.028,130.772 138.006,130.739 137.998,130.7 137.998,111.102 127.5,111.102 127.461,111.094 127.428,111.072 127.406,111.039 127.398,111 127.398,102.4 127.398,101.2 127.406,101.161 127.428,101.128 127.461,101.106 127.5,101.098 130.375,101.098 130.414,101.106 130.447,101.128 130.817,101.498 131.758,101.498 132.128,101.128 132.161,101.106 132.2,101.098 137.498,101.098 137.498,100.8 137.498,100.2 137.498,99.202 122.465,99.202 122.426,99.194 122.393,99.172 122.371,99.139 122.363,99.1 122.363,96.9 122.371,96.861 122.393,96.828 122.426,96.806 122.465,96.798 129.698,96.798 129.698,96.1 129.698,95.302 120.652,95.302 120.652,101.098 124.8,101.098 124.839,101.106 124.872,101.128 124.894,101.161 124.902,101.2 124.902,114.398 132.424,114.398 132.45,114.38 132.5,114.371 136,114.371 136.05,114.38 136.092,114.408 136.12,114.45 136.129,114.5 136.129,133.171 145.649,133.171
VL716_VCCU on Power Plane (split plane): 145.649,95.302 129.902,95.302 129.902,97.598 145.649,97.598
PRG_VIO on Power Plane (split plane): 118.398,166.929 65.302,166.929 65.302,170.698 118.398,170.698
PRG_3V3 on Power Plane (split plane): 123.498,166.929 118.602,166.929 118.602,170.8 118.594,170.839 118.572,170.872 118.539,170.894 118.5,170.902 65.302,170.902 65.302,175.69 123.498,175.69
VCCIO_34 on Power Plane (split plane): 87,147.098 95.798,147.098 95.798,144.8 95.798,141.702 87.902,141.702 87.902,142.9 87.894,142.939 87.872,142.972 87.572,143.272 87.539,143.294 87.5,143.302 84.942,143.302 84.702,143.542 84.702,144.8 84.694,144.839 84.672,144.872 83.902,145.642 83.902,146.358 84.642,147.098 87,147.098
1.0V on Power Plane (split plane): 86.898,148.8 86.898,147.302 84.6,147.302 84.561,147.294 84.528,147.272 83.728,146.472 83.706,146.439 83.698,146.4 83.698,145.6 83.706,145.561 83.728,145.528 84.498,144.758 84.498,143.5 84.506,143.461 84.528,143.428 84.828,143.128 84.861,143.106 84.9,143.098 87.458,143.098 87.698,142.858 87.698,141.6 87.706,141.561 87.728,141.528 87.761,141.506 87.8,141.498 95.798,141.498 95.798,138.2 95.798,137.602 85.1,137.602 80.902,137.602 80.902,141.6 80.902,143.7 80.902,143.729 80.902,144 80.902,145.6 80.894,145.639 80.872,145.672 80.839,145.694 80.8,145.702 75.102,145.702 75.102,147.3 75.094,147.339 75.072,147.372 75.039,147.394 75,147.402 71.602,147.402 71.602,148.9 71.602,149.398 78.9,149.398 78.939,149.406 78.972,149.428 79.842,150.298 80.858,150.298 81.299,149.857 81.636,149.519 81.669,149.497 81.708,149.49 81.892,149.49 81.931,149.497 81.964,149.519 82.272,149.828 82.294,149.861 82.302,149.9 82.302,150.1 82.294,150.139 82.272,150.172 81.972,150.472 81.939,150.494 81.9,150.502 81.742,150.502 81.437,150.807 81.437,150.993 82.342,151.898 86.898,151.898
3.3V on Power Plane (split plane): 82.598,158.142 81.328,156.872 81.306,156.839 81.298,156.8 81.298,155.2 81.298,154.4 81.298,152.902 79.8,152.902 79.761,152.894 79.728,152.872 78.03,151.174 78.008,151.141 78,151.102 78,150.646 78.008,150.607 78.03,150.574 78.276,150.328 78.309,150.306 78.348,150.298 78.816,150.298 79.185,149.929 78.858,149.602 75,149.602 71.602,149.602 71.602,151.1 71.602,162.398 82.598,162.398
1.8V on Power Plane (split plane): 84.325,160.4 84.325,156.869 83.728,156.272 83.706,156.239 83.698,156.2 83.698,152.8 83.706,152.761 83.728,152.728 83.761,152.706 83.8,152.698 86.898,152.698 86.898,152.102 82.3,152.102 82.261,152.094 82.228,152.072 81.263,151.107 81.241,151.074 81.233,151.035 81.233,150.765 81.241,150.726 81.263,150.693 81.628,150.328 81.661,150.306 81.7,150.298 81.858,150.298 82.098,150.058 82.098,149.942 81.849,149.694 81.751,149.694 81.443,150.001 80.972,150.472 80.939,150.494 80.9,150.502 79.8,150.502 79.761,150.494 79.728,150.472 79.329,150.073 78.93,150.472 78.897,150.494 78.858,150.502 78.39,150.502 78.204,150.688 78.204,151.06 79.842,152.698 81.4,152.698 81.439,152.706 81.472,152.728 81.494,152.761 81.502,152.8 81.502,154.4 81.502,155.2 81.502,156.758 82.772,158.028 82.794,158.061 82.802,158.1 82.802,162.5 82.794,162.539 82.772,162.572 82.739,162.594 82.7,162.602 65.302,162.602 65.302,166.725 84.325,166.725
1.0V_MGT on Power Plane (split plane): 71.398,148.9 71.398,147.3 71.406,147.261 71.428,147.228 71.461,147.206 71.5,147.198 74.898,147.198 74.898,145.6 74.906,145.561 74.928,145.528 74.961,145.506 75,145.498 80.698,145.498 80.698,144.102 65.802,144.102 65.802,149.398 71.398,149.398
MAIN_3V3 on Power Plane (split plane): 124.698,114.5 124.698,101.302 120.652,101.302 120.652,110.3 120.644,110.365 120.618,110.426 120.578,110.478 120.526,110.518 120.465,110.544 120.4,110.552 108.502,110.552 108.502,120.498 124.698,120.498
VCC_IN_3V3 on Power Plane (split plane): 150.29,163.951 145.7,163.951 145.661,163.946 145.624,163.931 145.622,163.929 132.5,163.929 132.45,163.92 132.408,163.892 132.38,163.85 132.371,163.8 132.371,146 132.371,114.602 124.902,114.602 124.902,120.6 124.894,120.639 124.872,120.672 124.839,120.694 124.8,120.702 108.4,120.702 108.361,120.694 108.328,120.672 108.306,120.639 108.298,120.6 108.298,110.552 67.352,110.552 67.352,119.248 95.8,119.248 95.865,119.256 95.926,119.282 95.978,119.322 96.018,119.374 96.044,119.435 96.052,119.5 96.052,132.6 96.044,132.665 96.018,132.726 95.978,132.778 95.926,132.818 95.865,132.844 95.8,132.852 51.31,132.852 51.31,175.69 65.098,175.69 65.098,170.8 65.098,166.854 65.101,166.84 65.098,166.827 65.098,162.5 65.106,162.461 65.128,162.428 65.161,162.406 65.2,162.398 71.398,162.398 71.398,151.1 71.398,149.602 65.7,149.602 65.661,149.594 65.628,149.572 65.606,149.539 65.598,149.5 65.598,144 65.598,138.5 65.598,137.5 65.606,137.461 65.628,137.428 65.661,137.406 65.7,137.398 80.8,137.398 85.1,137.398 95.9,137.398 95.939,137.406 95.972,137.428 95.994,137.461 96.002,137.5 96.002,138.2 96.002,141.6 96.002,144.8 96.002,147.2 95.994,147.239 95.972,147.272 95.939,147.294 95.9,147.302 90.302,147.302 90.302,151.198 99.9,151.198 99.939,151.206 99.972,151.228 102.142,153.398 108.244,153.398 108.244,148.088 105.528,145.372 105.506,145.339 105.498,145.3 105.498,125.7 105.506,125.661 105.528,125.628 105.561,125.606 105.6,125.598 108.4,125.598 108.439,125.606 108.472,125.628 108.494,125.661 108.502,125.7 108.502,140.658 111.272,143.428 111.294,143.461 111.302,143.5 111.302,148.398 122.7,148.398 122.739,148.406 122.772,148.428 122.794,148.461 122.802,148.5 122.802,150.9 122.794,150.939 122.772,150.972 122.739,150.994 122.7,151.002 111.202,151.002 111.202,158.671 111.194,158.71 111.172,158.743 111.139,158.765 111.1,158.773 95.329,158.773 95.329,166.725 123.6,166.725 123.639,166.733 123.672,166.755 123.694,166.788 123.702,166.827 123.702,175.69 150.29,175.69
VL716_OSCVCC12 on Power Plane (split plane): 126.098,92.6 126.106,92.561 126.128,92.528 126.161,92.506 126.2,92.498 145.649,92.498 145.649,90.002 120.652,90.002 120.652,95.098 126.098,95.098
3.3V on Power Plane (split plane): 95.125,158.659 95.133,158.62 95.155,158.587 95.188,158.565 95.227,158.557 95.266,158.565 95.273,158.569 110.998,158.569 110.998,150.9 111.006,150.861 111.028,150.828 111.061,150.806 111.1,150.798 122.598,150.798 122.598,148.602 111.2,148.602 111.161,148.594 111.128,148.572 111.106,148.539 111.098,148.5 111.098,143.542 108.328,140.772 108.306,140.739 108.298,140.7 108.298,125.802 105.702,125.802 105.702,145.258 108.418,147.974 108.44,148.007 108.448,148.046 108.448,153.5 108.44,153.539 108.418,153.572 108.385,153.594 108.346,153.602 102.1,153.602 102.061,153.594 102.028,153.572 99.858,151.402 90.2,151.402 90.161,151.394 90.128,151.372 90.106,151.339 90.098,151.3 90.098,147.302 87.102,147.302 87.102,148.8 87.102,152 87.102,152.8 87.094,152.839 87.072,152.872 87.039,152.894 87,152.902 83.902,152.902 83.902,156.158 84.499,156.755 84.521,156.788 84.529,156.827 84.529,166.725 95.125,166.725
1.2V_MGT on Power Plane (split plane): 80.698,143.071 80.698,142.871 80.698,141.6 80.698,137.602 65.802,137.602 65.802,138.5 65.802,143.898 79.129,143.898 79.13,143.898 80.698,143.898
GND on Power Plane (split plane): 95.548,119.752 67.1,119.752 67.035,119.744 66.974,119.718 66.922,119.678 66.882,119.626 66.856,119.565 66.848,119.5 66.848,110.3 66.856,110.235 66.882,110.174 66.922,110.122 66.974,110.082 67.035,110.056 67.1,110.048 120.148,110.048 120.148,86.831 120.144,86.8 120.144,76.71 51.31,76.71 51.31,132.348 95.548,132.348

## Keep-outs
Keep-Out Layer:
  lines w0.3: 52.1,77.5 52.1,174.9 149.5,174.9 149.5,77.5 52.1,77.5

## Other copper
Ground Plane (plane layer: these items are gaps in the copper):
  lines w0.127: 143,153.659 143.029,153.629 ; 145.7,148.5 145.7,148.6
  lines w0.254: 121.906,84.299 ccw(c122.87,83.15) 123.834,82.001 ; 123.959,78.372 cw(c122.51,78.76) 123.959,79.148 ; 130.041,78.372 ccw(c131.49,78.76) 130.041,79.148 ; 130.166,82.001 ccw(c131.13,83.15) 132.094,84.299
  lines w0.3: 134.3,79.1 135.9,79.1 146,79.1 147.7,80.8 147.7,83 145.8,84.9 145.8,146 150.8,146 ; 143,153.659 143,156 150.8,156 ; 143.029,153.629 145.7,153.629 145.7,148.6 ; 145.7,148.5 150.8,148.5
  lines w0.5: 128.496,104.133 128.496,110.984 132.084,110.984 132.084,99 129.85,99 129.85,102 128.5,102 128.5,104
  lines w0.508: 119.7,76.2 119.7,87.5 134.3,87.5 134.3,79.1
Power Plane (plane layer: these items are gaps in the copper):
  lines w0.2: 65.2,176.2 65.2,170.8 ; 73.427,166.827 84.427,166.827 ; 73.5,166.827 65.227,166.827 65.2,166.854 65.2,170.8 ; 75,149.5 71.5,149.5 ; 78.3,162.5 71.5,162.5 71.5,151.1 71.5,149.5 ; 79.329,149.929 78.858,150.4 78.348,150.4 78.102,150.646 78.102,151.102 79.8,152.8 81.4,152.8 81.4,154.4 81.4,155.2 81.4,156.8 82.7,158.1 82.7,162.5 76.3,162.5 65.2,162.5 65.2,166.827 74.927,166.827 84.427,166.827 ; 80.8,143.7 80.8,137.5 ; 80.8,143.729 80.8,143.071 ; 84.427,160.4 84.427,166.827 ; 95.227,158.659 95.227,166.827 ; 95.227,158.671 111.1,158.671 111.1,150.9 122.7,150.9 122.7,148.5 111.2,148.5 111.2,143.5 108.4,140.7 108.4,125.7 105.6,125.7 105.6,145.3 108.346,148.046 108.346,153.5 102.1,153.5 99.9,151.3 90.2,151.3 90.2,147.2 ; 118.5,166.827 118.5,170.8 101.6,170.8 77.2,170.8 65.2,170.8 ; 118.5,176.2 121.2,176.2 ; 123.6,176.2 123.6,166.827 115.873,166.827 106.973,166.827 95.227,166.827 ; 127.5,109.2 128.3,109.2 139.3,109.2 139.3,128.2 145.8,128.2 ; 129.8,96.1 129.8,95.2 ; 129.8,96.9 129.63,96.9 122.465,96.9 122.465,99.1 137.6,99.1 137.6,100.2 ; 131.6,105.5 141.8,105.5 141.8,123.132 145.8,123.132 ; 132.5,114.5 124.8,114.5 124.8,101.2 ; 145.8,89.9 120.45,89.9 120.45,95.2 ; 145.8,92.6 126.2,92.6 126.2,95.2 ; 145.8,95.2 126.2,95.2 ; 145.8,97.7 129.8,97.7 129.8,95.2 ; 145.8,100.2 137.6,100.2 ; 145.8,102.8 131.6,102.8 ; 145.8,125.6 140.5,125.6 140.5,107.5 131.6,107.5 131.6,102.8 ; 145.8,130.7 138.1,130.7 138.1,111 127.5,111 127.5,102.4 ; 65.7,144 70.7,144 71.6,144 80.8,144 ; 65.7,144 65.7,149.5 70.7,149.5 71.5,149.5 ; 65.7,144 65.7,138.5 65.7,137.5 77.5,137.5 80.8,137.5 ; 65.7,144 75,144 79.129,144 ; 71.5,147.3 75,147.3 ; 71.5,147.3 71.5,149.5 ; 71.5,147.3 75,147.3 ; 71.5,147.3 71.5,148.9 ; 71.5,148.9 71.5,148.9 ; 71.5,148.9 71.5,149.5 ; 71.5,149.5 78.9,149.5 79.8,150.4 80.767,150.4 80.9,150.4 81.371,149.929 81.708,149.592 81.892,149.592 82.2,149.9 82.2,150.1 81.9,150.4 81.7,150.4 81.335,150.765 81.335,151.035 82.3,152 87,152 ; 75,147.3 75,145.6 80.8,145.6 80.8,144 ; 79.129,144 79.129,144 ; 79.129,144 80.8,144 ; 80.8,137.5 80.8,141.6 80.8,142.871 80.8,143.071 ; 80.8,137.5 85.1,137.5 95.9,137.5 95.9,138.2 95.9,141.6 ; 80.8,143.071 80.8,144 ; 84.427,166.827 84.427,156.827 83.8,156.2 83.8,152.8 87,152.8 87,152 ; 84.427,166.827 95.227,166.827 ; 87,147.2 84.6,147.2 83.8,146.4 83.8,145.6 84.6,144.8 84.6,143.5 84.9,143.2 87.5,143.2 87.8,142.9 ; 87,147.2 90.2,147.2 ; 87,147.2 87,148.8 87,147.2 ; 87,147.2 87,152 ; 87.8,142.9 87.8,141.6 88.6,141.6 90.2,141.6 ; 87.8,142.9 87.8,142.9 ; 90.2,141.6 95.9,141.6 ; 90.2,141.6 95.9,141.6 ; 90.2,147.2 95.9,147.2 95.9,144.8 95.9,141.6 ; 120.45,95.2 126.2,95.2 ; 120.45,95.2 129.8,95.2 ; 120.45,95.2 120.45,101.2 ; 120.45,101.2 124.8,101.2 ; 120.45,101.2 120.45,110.2 108.4,110.2 108.4,120.6 117.535,120.6 124.8,120.6 124.8,101.2 ; 120.45,101.2 124.8,101.2 ; 127.5,102.4 127.5,101.2 129.3,101.2 130.375,101.2 130.775,101.6 131.8,101.6 132.2,101.2 137.6,101.2 137.6,100.8 137.6,100.2 ; 127.5,102.4 128.565,102.4 131.2,102.4 131.6,102.8 ; 136,133.3 136,133.3
  lines w0.254: 145.7,163.8 132.5,163.8 132.5,146 132.5,114.5 136,114.5 136,133.3 138,133.3 145.8,133.3
  lines w0.3: 133.6,79.1 145.8,79.1 145.8,89.9 145.8,92.6 145.8,95.2 145.8,97.7 145.8,100.2 ; 145.8,100.265 145.8,146 150.8,146 ; 150.8,156 143,156 143,158.7 145.7,158.7 145.7,163.8 150.6,163.8 150.8,164
  lines w0.5: 50.8,132.6 95.8,132.6 95.8,119.5 67.1,119.5 67.1,110.3 105.4,110.3 120.4,110.3 120.4,86.8 120.4,76.2 95.8,76.2
  lines w0.508: 120.4,76.2 120.4,86.8 133.6,86.8 133.6,79.1

## Silkscreen, mask and mechanical layers (free items; w line width, h text height)
Top Overlay:
  text "company: unnamed" at 113,135 h1.52
  text "project: wp2017" at 113,132 h1.52
  text "revision: 1.0-dbg" at 113,129 h1.52
Bottom Overlay:
  drawing of 8 lines, arcs and shapes, not listed
  text "a.shumov" at 133.9,164.425 h1.52 r90
  text "2018.03.01" at 136.9,164.425 h1.52 r90
  text "Saratov" at 139.9,164.425 h1.52 r90
Drill Drawing:
  text ".LEGEND" at 155.88,81.28 h1
  text "Drill Drawing." at 155.88,78.74 h1

## Dimensions
52.1,77.5 to 52.1,174.9 on Mechanical 1
52.1,77.5 to 149.5,77.5 on Mechanical 1